# Altium PCB PCB1-LTC2949-V1.PcbDoc
Units mil, origin at the board's own origin, x right, y up, seen from the top; angles counter-clockwise.
Board outline 6000 x 4000 mil, 2 copper layers (Top Layer, Bottom Layer); 41 components, 41 nets, 144 pads, 10 vias.
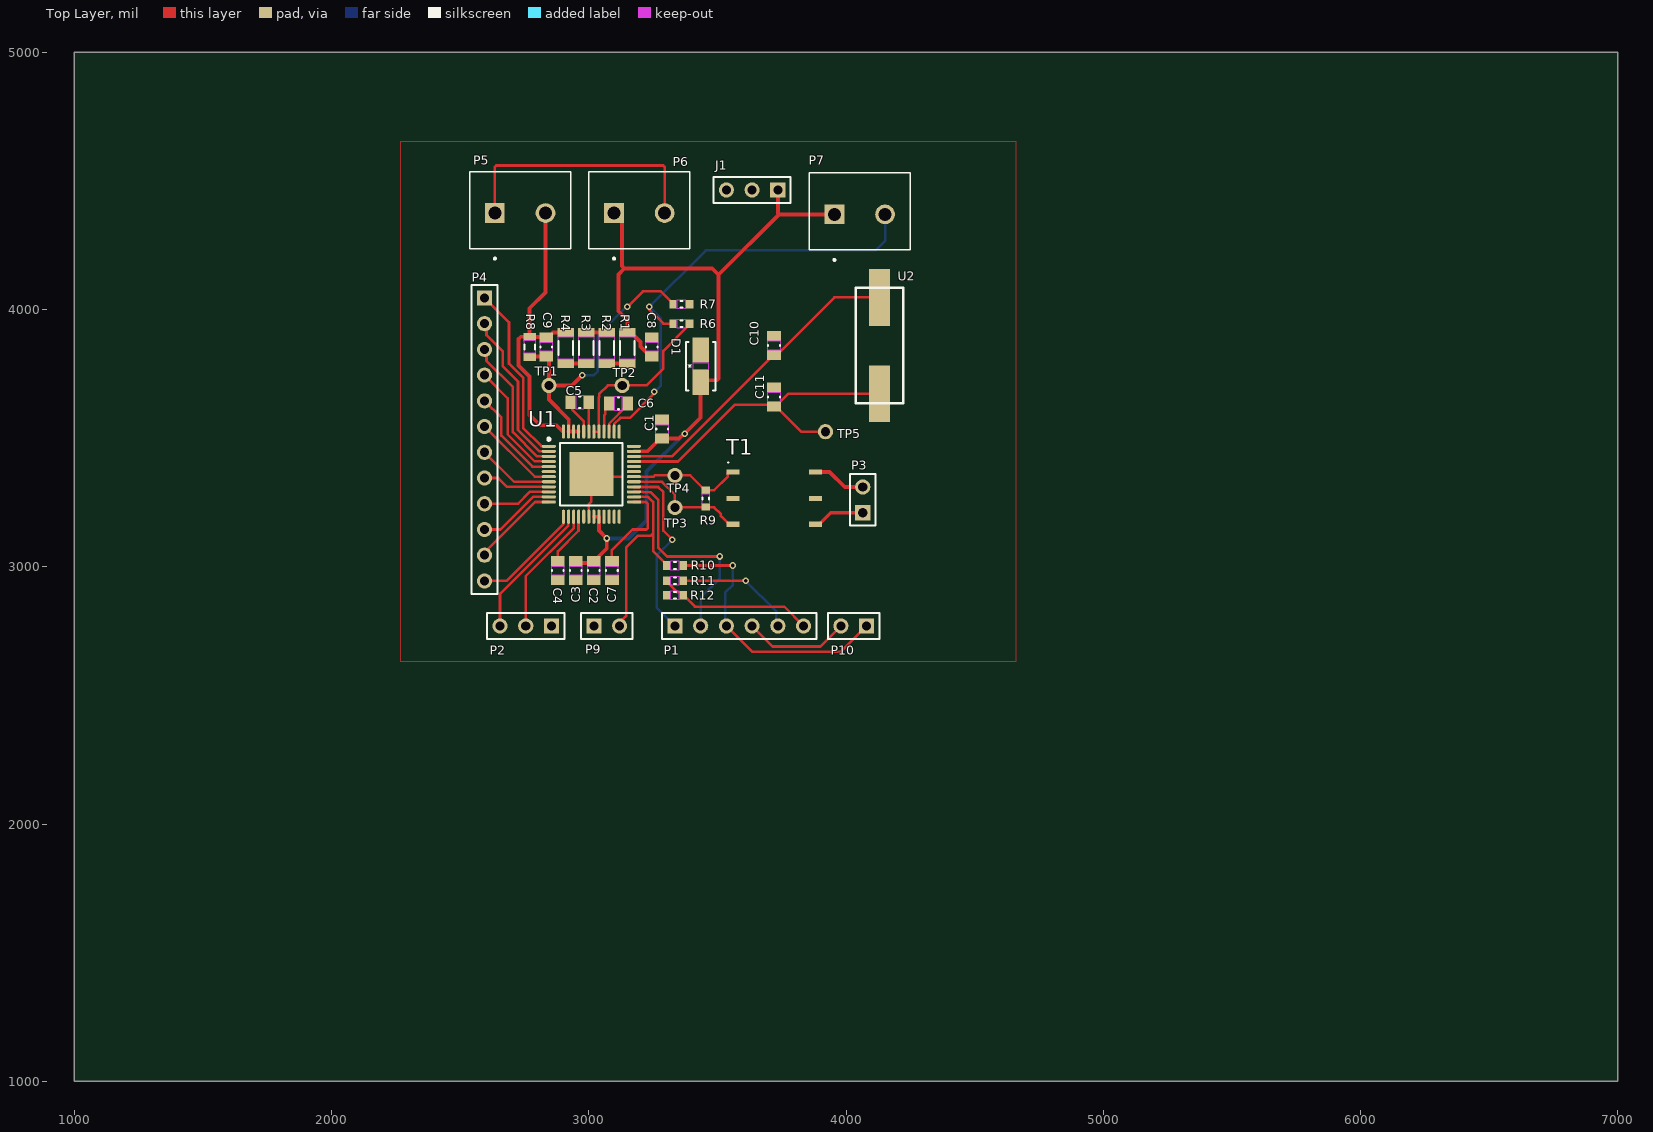
[diagram p0: Top Layer view]
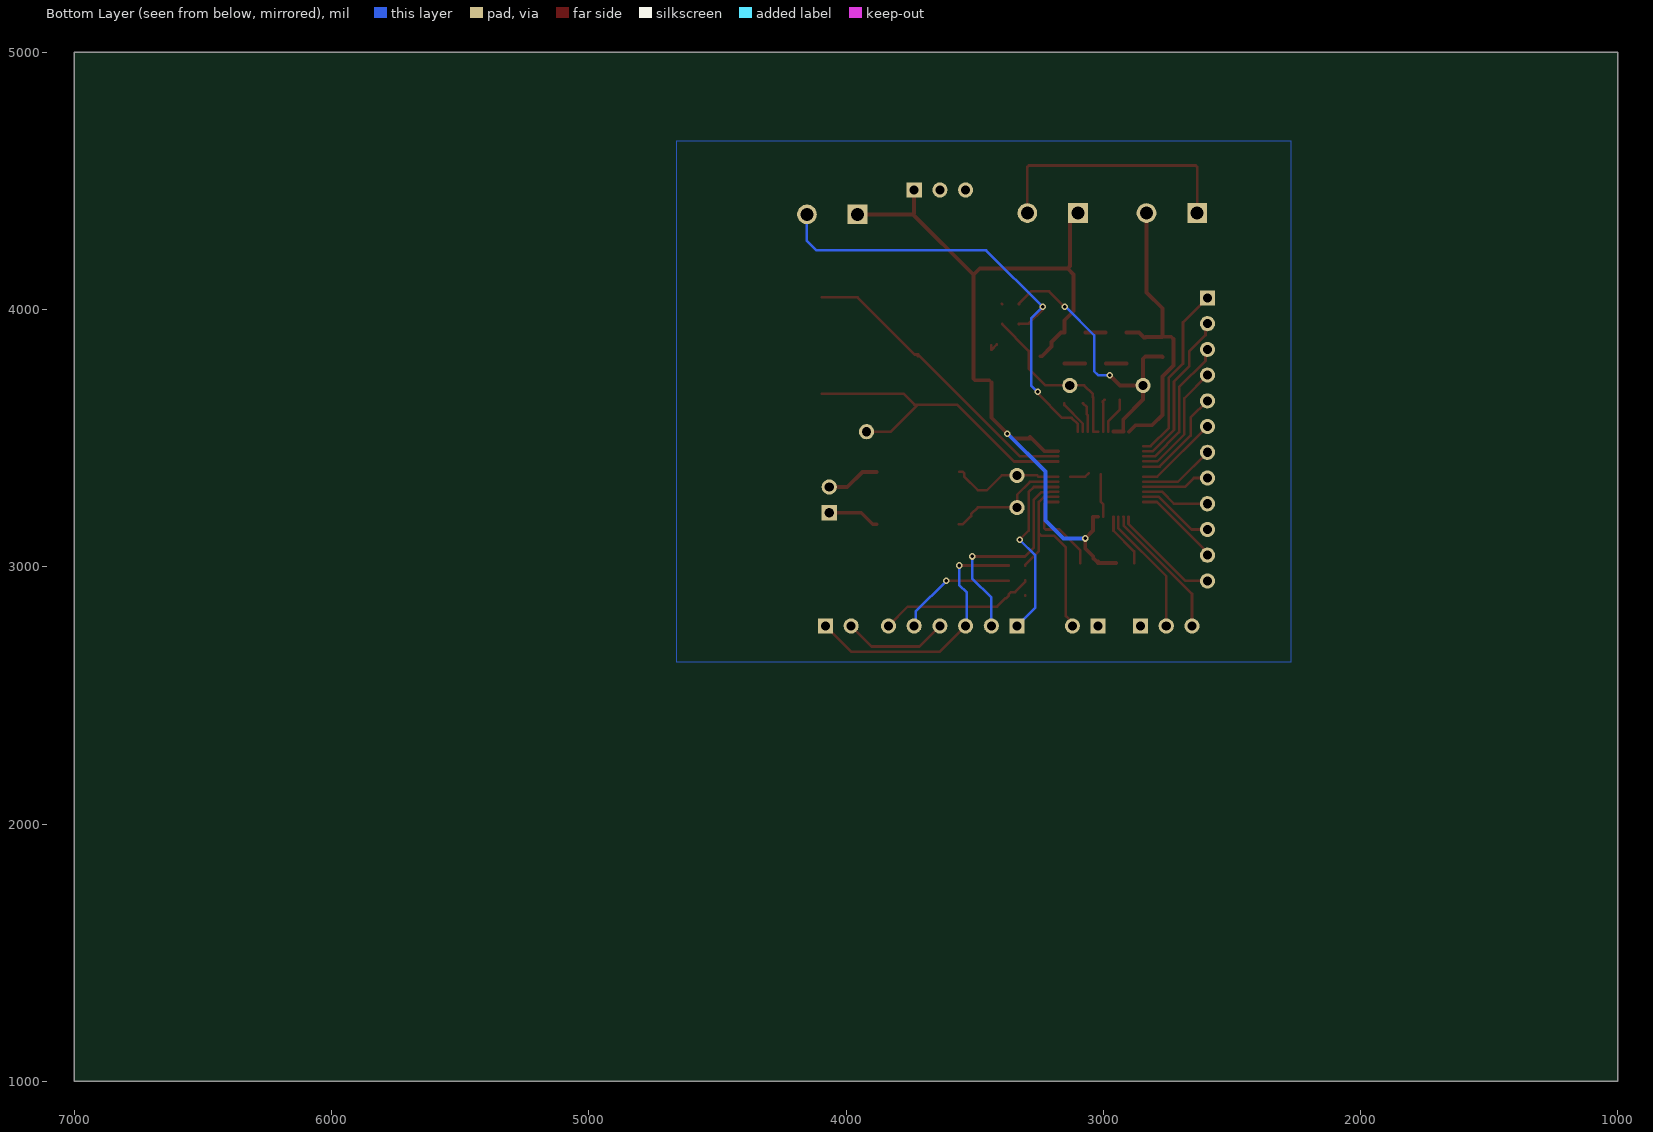
[diagram p1: Bottom Layer view, seen from below]
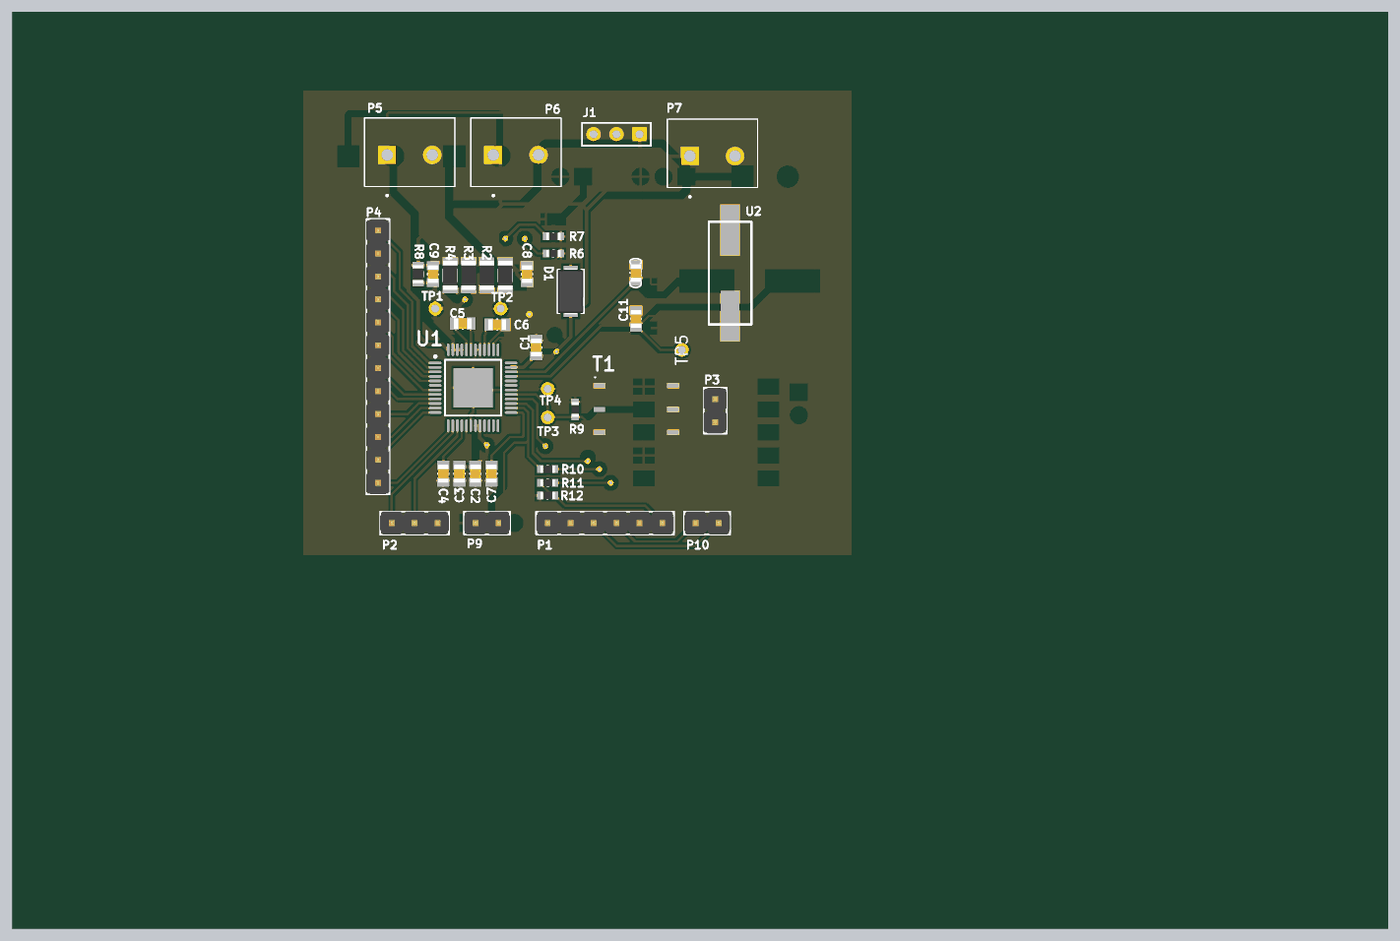
[diagram p2: 3D render of the assembled board from above, using the file's embedded part models]

## Layer stack, top to bottom
Top Solder: solder mask 0.4, Solder Resist, Dk 3.5
Top Layer: signal copper 1.4
Dielectric 1: dielectric 12.6, FR-4, Dk 4.8
Bottom Layer: signal copper 1.4
Bottom Solder: solder mask 0.4, Solder Resist, Dk 3.5

## Board outline
1000,1000 7000,1000 7000,5000 1000,5000

## Design rules (kind name [scope] priority, off if disabled: settings)
Clearance [All] p1: gap=10 ignorepadtopadclearanceinfootprint=FALSE except(0: Arc-Hole Track-Hole SMDPad-Hole THPad-Hole Via-Hole Fill-Hole Poly-Hole Region-Hole Text-Hole; 5: Arc-Arc Arc-Track Track-Track SMDPad-SMDPad; 7.87: Arc-SMDPad Track-SMDPad)
PolygonConnect [All] p1: connectstyle=Relief reliefconductorwidth=10 reliefentries=4 polygonreliefangle="90 Angle" airgapwidth=10
RoutingVias [All] p1: holewidth=28 width=50 viastyle="Through Hole" minholewidth=28 minwidth=50 maxholewidth=28 maxwidth=50
SolderMaskExpansion [All] p1: expansion=1.97 istentingtop=FALSE
Width [All] p1: maxlimit=20 minlimit=5 preferedwidth=10 minimp=50.000000 maximp=50.000000 favimp=50.000000
30 further rules are at their usual default settings.

## Classes and differential pairs
net class V[1..12]: V1 V2 V3 V4 V5 V6 V7 V8 V9 V10 V11 V12
component class "MAIN IC": C1 C2 C3 C4 C5 C6 C7 C8 C9 C10 C11 D1 J1 P1 R1 R2 R3 R4 R6 R7 R8 R9 R10 R11 R12 TP1 TP2 TP3 TP4 TP5 U1 U2
component class CONNECTORS: P2 P3 P4 P5 P7 P10

## Components (designator, comment, footprint, x,y, rotation, side; value= is the part's Value field where it differs from the comment)
C1 "Nonpolarized Capacitor" "0805 - Capacitor" 3285,3535 r90 top value=1uF
C2 "Nonpolarized Capacitor" "0805 - Capacitor" 3020,2985.16 r270 top value=1uF
C3 "Nonpolarized Capacitor" "0805 - Capacitor" 2950,2985.16 r270 top value=1uF
C4 "Nonpolarized Capacitor" "0805 - Capacitor" 2880,2985.16 r270 top value=1uF
C5 "Nonpolarized Capacitor" "0805 - Capacitor" 2965,3640 r0 top value=1uF
C6 "Nonpolarized Capacitor" "0805 - Capacitor" 3115,3635 r0 top value=1uF
C7 "Nonpolarized Capacitor" "0805 - Capacitor" 3090,2985.16 r270 top value=1uF
C8 "Nonpolarized Capacitor" "0805 - Capacitor" 3245,3855 r90 top value=100pF
C9 "Nonpolarized Capacitor" "0805 - Capacitor" 2835,3855 r90 top value=4.7nF
C10 "Nonpolarized Capacitor" "0805 - Capacitor" 3720,3860 r270 top value=28pF
C11 "Nonpolarized Capacitor" "0805 - Capacitor" 3720,3660 r270 top value=28pF
D1 "Zener" "SMA - DIODE" 3435,3780 r270 top
J1 "1x3 Header" HDR1X3 3735,4465 r180 top
P1 "1x6 Header" HDR1X6 3335,2770 r0 top
P2 "1x3 Header" HDR1X3 2855,2770 r180 top
P3 "1x2 Header" HDR1X2 4065,3210 r90 top
P4 "1x12 Header" HDR1X12 2595,4045 r270 top
P5 "CUI_TB002-500-02" CUI_TB002-500-02 2635,4375 r0 top
P6 "CUI_TB002-500-02" CUI_TB002-500-02 3098.15,4375 r0 top
P7 "CUI_TB002-500-02" CUI_TB002-500-02 3955,4370 r0 top
P9 "1x2 Header" HDR1X2 3020,2770 r0 top
P10 "1x2 Header" HDR1X2 4080,2770 r180 top
R1 "Resistor" "1206 - Resistor" 3150,3850 r90 top value=100k
R2 "Resistor" "1206 - Resistor" 3070,3850 r270 top value=100k
R3 "Resistor" "1206 - Resistor" 2990,3850 r90 top value=100k
R4 "Resistor" "1206 - Resistor" 2910,3850 r270 top value=100k
R6 "Resistor" "0603 - Resistor" 3360,3945 r180 top value=100m
R7 "Resistor" "0603 - Resistor" 3360,4020 r180 top value=1k
R8 "Resistor" "0805 - Resistor" 2770,3855 r90 top value=10k
R9 "Resistor" "0603 - Resistor" 3455,3265 r90 top value=120
R10 "Resistor" "0603 - Resistor" 3335,3005 r0 top value=5k
R11 "Resistor" "0603 - Resistor" 3335,2945 r0 top value=3k
R12 "Resistor" "0603 - Resistor" 3335,2890 r180 top value=1k
T1 "HM2101NLT" HM2101NLT 3720,3265 r270 top
TP1 "Test Point" "Test Point" 2845,3705 r90 top locked
TP2 "Test Point" "Test Point" 3130,3705 r90 top locked
TP3 "Test Point" "Test Point" 3335,3230 r90 top locked
TP4 "Test Point" "Test Point" 3335,3355 r90 top locked
TP5 "Test Point" "Test Point" 3920,3525 r90 top locked
U1 "LTC2949" LTC2949 3010,3360 r0 top
U2 "ABLS-4.000MHZ-K4T" ABLS_4MHZ-K4T 4130,3860 r270 top

## Footprints (in the part's own frame and the unit in brackets; to place one, negate y for a bottom-side part, rotate by r counter-clockwise, add the part's x,y. Pads: shape width x height; smd on the part's side, far side on the other; paste and mask are expansions set on the pad)
"0603 - Resistor" [mm] "0603 Chip Resistor - IPC Medium Density"
  rect 0.7x0.85 smd: 1(-0.825,0) 2(0.825,0)
  Top Layer keep-out region: -0.45,0.4 -0.45,-0.4 0.45,-0.4 0.45,0.4
  silkscreen extent -0.1,-0.33 0.1,0.33, body extent -0.8,-0.4 0.8,0.4, height 0.45
"0805 - Capacitor" [mm] "0805 Chip Capacitor - IPC Medium Density"
  rect 1x1.35 smd: 1(-0.925,0) 2(0.925,0)
  Top Layer keep-out region: -0.4,0.65 -0.4,-0.65 0.4,-0.65 0.4,0.65
  silkscreen extent -0.05,-0.58 0.05,0.58, body extent -1,-0.6 1,0.6, height 1.2
"0805 - Resistor" [mm] "0805 Chip Resistor - IPC Medium Density"
  rect 0.75x1.25 smd: 1(-1,0) 2(1,0)
  Top Layer keep-out region: -0.6,0.6 -0.6,-0.6 0.6,-0.6 0.6,0.6
  silkscreen extent -0.25,-0.53 0.25,0.53, body extent -1,-0.6 1,0.6, height 0.5
"1206 - Resistor" [mm] "1206 Chip Resistor - IPC Medium Density"
  rect 0.9x1.65 smd: 1(-1.525,0) 2(1.525,0)
  Top Layer keep-out region: -1.05,0.8 -1.05,-0.8 1.05,-0.8 1.05,0.8
  silkscreen extent -0.7,-0.72 0.7,0.72, body extent -1.6,-0.8 1.6,0.8, height 0.55
ABLS_4MHZ-K4T [mm]
  rect 5.6x2.1 smd: 1(-4.75,0) 2(4.75,0)
  silkscreen extent -5.7,-2.35 5.7,2.35
CUI_TB002-500-02 [mm] "1x2 Screw Terminal Block"
  rect 1.95x1.95 hole 1.3: 1(0,0)
  round 1.95 hole 1.3: 2(5,0)
  silkscreen extent -2.5,-4.6 7.5,4.1, body extent -2.5,-3.95 8,3.65, height 10
HDR1X2 [mm] "Connector; Header; 2 Position"
  rect 1.5x1.5 hole 0.9: 1(0,0)
  round 1.5 hole 0.9: 2(2.54,0)
  silkscreen extent -1.27,-1.27 3.81,1.27, body extent -1.27,-1.27 3.81,1.27, height 8.54
HDR1X3 [mm] "Connector; Header; 3 Position"
  rect 1.5x1.5 hole 0.9: 1(0,0)
  round 1.5 hole 0.9: 2(2.54,0) 3(5.08,0)
  silkscreen extent -1.27,-1.27 6.35,1.27
HDR1X6 [mm] "Connector; Header; 6 Position"
  rect 1.5x1.5 hole 0.9: 1(0,0)
  round 1.5 hole 0.9: 2(2.54,0) 3(5.08,0) 4(7.62,0) 5(10.16,0) 6(12.7,0)
  silkscreen extent -1.27,-1.27 13.97,1.27, body extent -1.27,-1.27 13.97,1.27, height 8.54
HDR1X12 [mm] "Connector; Header; 12 Position"
  rect 1.5x1.5 hole 0.9: 1(0,0)
  round 1.5 hole 0.9: 2(2.54,0) 3(5.08,0) 4(7.62,0) 5(10.16,0) 6(12.7,0) 7(15.24,0) 8(17.78,0) 9(20.32,0) 10(22.86,0) 11(25.4,0) 12(27.94,0)
  silkscreen extent -1.27,-1.27 29.21,1.27, body extent -1.27,-1.27 29.21,1.27, height 8.54
HM2101NLT [mm]
  rect 0.51x1.27 smd: 1(-2.64,-4.05) 2(0,-4.05) 3(2.53,-4.045) 4(2.53,4.095) 5(0,4.095) 6(-2.64,4.095)
  silkscreen extent -3.55,-4.55 -3.55,-4.5, body extent -3.88,-4.35 3.78,4.45, height 0.25
LTC2949 [mm] "LQFP, 48-Leads, IPC Medium Density"
  oval 1.4x0.3 smd mask+0.05: 1(-4.2,2.75) 2(-4.2,2.25) 3(-4.2,1.75) 4(-4.2,1.25) 5(-4.2,0.75) 6(-4.2,0.25) 7(-4.2,-0.25) 8(-4.2,-0.75) 9(-4.2,-1.25) 10(-4.2,-1.75) 11(-4.2,-2.25) 12(-4.2,-2.75) 25(4.2,-2.75) 26(4.2,-2.25) 27(4.2,-1.75) 28(4.2,-1.25) 29(4.2,-0.75) 30(4.2,-0.25) 31(4.2,0.25) 32(4.2,0.75) 33(4.2,1.25) 34(4.2,1.75) 35(4.2,2.25) 36(4.2,2.75)
  oval 0.3x1.4 smd mask+0.05: 13(-2.75,-4.2) 14(-2.25,-4.2) 15(-1.75,-4.2) 16(-1.25,-4.2) 17(-0.75,-4.2) 18(-0.25,-4.2) 19(0.25,-4.2) 20(0.75,-4.2) 21(1.25,-4.2) 22(1.75,-4.2) 23(2.25,-4.2) 24(2.75,-4.2) 37(2.75,4.2) 38(2.25,4.2) 39(1.75,4.2) 40(1.25,4.2) 41(0.75,4.2) 42(0.25,4.2) 43(-0.25,4.2) 44(-0.75,4.2) 45(-1.25,4.2) 46(-1.75,4.2) 47(-2.25,4.2) 48(-2.75,4.2)
  rect 4.35x4.35 smd: 49(0,0)
  silkscreen extent -4.32,-3.1 3.1,3.57, body extent -3.5,-3.5 3.5,3.5, height 1.6
"SMA - DIODE" [mm] "Molded Diode, 2-Leads, Body 4.38x2.63mm, IPC Medium Density"
  rect 2.5x1.6 smd: 1(-1.6,0) 2(1.6,0)
  Top Layer keep-out region: -0.3,0.8 -0.3,-0.8 0.3,-0.8 0.3,0.8
  silkscreen extent -2.4,-1.45 2.4,1.45, body extent -2.6,-1.43 2.6,1.43, height 2.95
"Test Point" [mm] "Test Point"
  round 1.5 hole 0.9: 1(0,0)

## Part data
C1 C2 C3 C4 C5 C6 C7 C8 C9 C10 C11: library part "Capacitor - Nonpolarized"
D1: "Zener Diode"
J1 P2: "1x3 Pin Header"
P1: "1x6 Pin Header"
P3 P9 P10: "1x2 Pin Header"
P4: "1x12 Pin Header"
P5 P6 P7: "1x2 Screw Terminal Block", Manufacturer="CUI Devices", Manufacturer Part Number=TB002-500-02BE, Supplier Part Number=102-6145-ND, Supplier=Digikey
T1: "Pulse Transformer 1:1 Surface Mount 150µH, 450µH"
U1: Manufacturer="Analog Devices", Manufacturer Part Number=LTC2949ILXE#3ZZPBF, Supplier Part Number=584-2949ILXE3ZZPBF, Supplier=Mouser
U2: "Crystal Oscillator 4MHz 18pF"

## Via types
v1: diameter 25.59, hole 13.78, Top Layer to Bottom Layer, 10 vias

## Nets (pads, with @x,y where several pads share a name; then routed paths per layer and width w, separated by ;. In a path a pad name is that pad's centre, name@x,y a point inside that pad or via, vN(x,y) a via of type N, cw(c..) or ccw(c..) an arc to the next point about the centre after c; other vN are vias at no path point)
+12: C1.1 C2.1 C3.1 C8.1 D1.2 J1.1 P6.1 P7.1 R1.2 U1.19 U1.20 U1.35 | length 3524.5
  Top Layer w10: U1.19 U1.19@3020,3194.49 ; P6.1@3075,4351.85 P6.1 ; D1.2 D1.2@3442.99,3725
  Top Layer w15: C3.1@2950,3014.69 3020,3014.69 C2.1 3026.89,3021.57 3039.07,3033.76 3039.07,3040.65 3070,3071.57 v1(3070,3110) 3039.53,3140.47 U1.20 U1.19 ; P6.1 3129.04,4344.11 3129.04,4169.11 3138.15,4160 ; U1.35@3175.35,3448.9 3228.43,3448.9 C1.1@3285,3505.47 ; C8.1 3238.11,3818.58 3200.45,3856.24 3200.45,3874.35 3164.76,3910.04 R1.2 3150,3958.24 3115,3993.24 3115,4136.85 3138.15,4160 ; C1.1 3351.41,3498.58 3369.98,3517.15 v1(3372.85,3517.15) ; v1@3375,3519.31 3435,3579.31 D1.2 ; D1.2@3442.99,3725 3499.14,3725 3505,3730.86 3505,4135 ; J1.1 3735,4375 3740,4370 ; P7.1 3740,4370 ; 3138.15,4160 3480,4160 3505,4135 ; 3505,4135 3740,4370
  Bottom Layer w15: v1(3070,3110) 3155,3110 3225,3180 3225,3370 3372.15,3517.15 v1(3372.85,3517.15)
AGND: C1.2 C2.2 C3.2 C4.2 C7.2 C8.2 C9.1 C10.1 C11.1 D1.1 J1.3 P5.1 P6.2 P9.1 R7.1 R7.2 R8.1 R12.2 TP1.1 U1.17 U1.18 U1.45 U1.47 U1.49 | length 2502
  Top Layer w10: P5.1 2635,4554.14 2640.86,4560 3289.14,4560 3295,4554.14 P6.2 ; U1.18 3000.16,3243.16 3010,3253 U1.49 ; U1.49@3056.87,3363.16 3069.87,3350.16 3127.14,3350.16 ; v1(3150,4010) 3210.24,4070.24 3280.24,4070.24 3327.52,4022.95 R7.2 ; R12.2@3302.52,2887.05 R12.2 ; R7.1 R7.1@3395,4022.52 ; D1.1@3413.93,3864.06 D1.1 D1.1@3435,3860.71
  Top Layer w15: R8.1 2771.48,3817.11 2833.52,3817.11 C9.1 2845,3808.58 TP1.1 ; U1.47 U1.47@2922,3525.35 ; U1.45 U1.47@2922,3525.35 ; v1(2975,3745) 2935,3705 TP1.1 ; TP1.1 2845,3650.18 2922,3573.18 U1.47@2922,3525.35
  Bottom Layer w10: v1(2975,3745) 3020,3745 3035,3760 3035,3900 3145,4010 v1(3150,4010) v1@3150,4016.57
CLKI: C11.2 TP5.1 U1.33 U2.2 | length 1272.6
  Top Layer w10: U1.33 3346.91,3409.21 3568.17,3630.47 C11.2@3720,3630.47 ; TP5.1 3825.47,3525 C11.2@3720,3630.47 ; U2.2@4095,3672.99 3776.3,3672.99 3733.78,3630.47 C11.2@3720,3630.47
CLKO: C10.2 U1.34 U2.1 | length 1193.2
  Top Layer w10: U1.34 3323.9,3428.9 C10.2@3716.79,3821.79 ; C10.2@3710.83,3816.3 C10.2@3720,3825.47 ; C10.2@3720,3818.58 C10.2@3726.65,3825.24 ; C10.2@3720.24,3825.24 C10.2@3726.65,3825.24 ; U2.1@4095,4047.01 3955.31,4047.01 3733.54,3825.24 C10.2@3726.65,3825.24
IOVCC: P9.2 R10.1 U1.26 | length 794.8
  Top Layer w10: P9.2 3120,2782.97 3145,2807.97 3145,3075 3190,3120 3240,3120 3250,3130 ; U1.26 3231.01,3271.42 3250,3252.43 3250,3130 ; R10.1 3302.52,3007.95 3250,3060.47 3250,3130
NetC4_1: C4.1 U1.16 | length 213.4
  Top Layer w10: C4.1@2880,3014.69 2880,3060 2960,3140 2960,3193.86 U1.16
NetC5_1: C5.1 U1.44 | length 143.3
  Top Layer w10: C5.1@2935.47,3650 2935.47,3610.47 2980,3565.94 2980,3525.83 U1.44
NetC5_2: C5.2 U1.43 | length 125.3
  Top Layer w10: C5.2@2994.53,3650 C5.2@3001.63,3642.89 ; U1.43 3000.16,3593.78 3000,3593.94 3000,3638.58 C5.2
NetC6_1: C6.1 U1.40 | length 117.3
  Top Layer w10: U1.40@3060,3525.35 3060,3588.28 3063.9,3592.18 3063.9,3620.31 C6.1
NetC6_2: C6.2 U1.39 | length 139.8
  Top Layer w10: U1.39@3078.9,3525.26 U1.39 3079.24,3525.7 3079.24,3555.94 3151.42,3628.11 C6.2
NetC7_1: C7.1 U1.25 | length 377
  Top Layer w10: C7.1@3090,3014.69 3090,3065 3170,3145 3224.14,3145 3230,3150.86 3230,3244.14 3222.41,3251.73 U1.25
NetP1_1: P1.1 U1.28 | length 711.3
  Top Layer w10: U1.28@3175.35,3310 3270,3310 3290,3290 3290,3140 v1(3325,3105)
  Bottom Layer w10: v1(3325,3105) 3265,3045 3265,2840 P1.1
NetP1_2: P1.2 U1.27 | length 848.5
  Top Layer w10: U1.27 3210.61,3291.1 3211.72,3290 3240.71,3290 3270,3260.71 3270,3075 3305,3040 v1(3510,3040)
  Bottom Layer w10: P1.2 3435,2880 3510,2955 v1(3510,3040)
NetP1_3: P1.3 P10.1 R10.2 | length 1069.9
  Top Layer w10: R10.2 v1(3560,3005) ; P1.3 3635,2670 3980,2670 P10.1
  Bottom Layer w10: P1.3 3530,2775 3530,2900 3560,2930 v1(3560,3005)
NetP1_4: P1.4 P10.2 | length 411.3
  Top Layer w10: P1.4 3715,2690 3900,2690 P10.2
NetP1_5: P1.5 R11.2 | length 479.9
  Top Layer w10: R11.2 v1(3610,2945) ; P1.5@3727.5,2777.5 P1.5
  Bottom Layer w10: v1(3610,2945) 3729.65,2825.35 3729.65,2775.35 P1.5
NetP1_6: P1.6 R11.1 R12.1 | length 613.1
  Top Layer w10: R11.1@3302.52,2947.95 R11.1 3302.52,2942.05 3342.83,2901.73 3358.7,2901.73 3367.48,2892.95 R12.1 3367.48,2887.05 3376.26,2878.27 3379.21,2878.27 3412.48,2845 3760,2845 P1.6
NetP2_2: P2.2 U1.15 | length 501.7
  Top Layer w10: P2.2 2755,2963.28 2941.1,3149.39 U1.15
NetP2_3: P2.3 U1.14 | length 535
  Top Layer w10: P2.3 2655,2895 2921.07,3161.07 2921.07,3194.3 U1.14
NetP3_1: P3.1 T1.4 | length 202.3
  Top Layer w15: T1.4 3896.18,3165.39 3940.79,3210 P3.1
NetP3_2: P3.2 T1.6 | length 208.2
  Top Layer w15: T1.6 3936.06,3368.94 3995,3310 P3.2
NetP7_2: P7.2 R6.2 U1.38 | length 1859.3
  Top Layer w10: U1.38 3098.93,3525.7 3098.93,3554.23 3123.36,3578.66 3159.54,3578.66 3252.02,3671.13 3252.02,3677.02 v1(3255,3680) ; v1(3235,4010) 3235,4000 3290,3945 R6.2 R6.2@3327.52,3942.05
  Bottom Layer w10: v1(3255,3680) 3280,3705 3280,3965 3237.5,4007.5 3232.5,4007.5 3455,4230 4115,4230 4151.85,4266.85 P7.2
NetP8_2: R6.1 TP2.1 U1.41 U1.42 | length 673.9
  Top Layer w10: U1.42 U1.41 3039.53,3659.53 3040,3660 3040,3670.88 3074.12,3705 TP2.1 3225,3705 3290,3770 3290,3839.57 3392.48,3942.05 R6.1
NetR1_1: R1.1 R2.2 | length 80
  Top Layer w15: R2.2 R1.1
NetR2_1: R2.1 R3.2 | length 80
  Top Layer w15: R3.2 R2.1
NetR3_1: R3.1 R4.2 | length 80
  Top Layer w15: R4.2 R3.1
NetR9_1: R9.1 T1.3 TP3.1 U1.29 | length 487.9
  Top Layer w10: U1.29@3175.35,3330 3285,3330 3335,3280 TP3.1 3336.26,3231.26 3486.73,3231.26 3513.74,3204.25 3513.74,3197.44 3545.79,3165.39 T1.3
NetR9_2: R9.2 T1.1 TP4.1 U1.30 | length 448
  Top Layer w10: U1.30 3252.5,3350.16 3257.34,3355 TP4.1 3394.53,3355 3452.05,3297.48 R9.2 3486.73,3297.48 3540.55,3351.3 3540.55,3363.9 3545.59,3368.94 T1.1
V1: P4.1 U1.1 | length 696.5
  Top Layer w10: P4.1 2690,3950 2690,3790 2745,3735 2745,3540 2816.39,3468.61 2844.3,3468.61 U1.1
V2: P4.2 U1.2 | length 621.3
  Top Layer w10: P4.2 2602.5,3937.5 2602.5,3900.47 2665,3837.97 2665,3780 2725,3720 2725,3531.57 2807.64,3448.93 2844.3,3448.93 U1.2
V3: P4.3 U1.3 | length 546
  Top Layer w10: P4.3 2602.5,3837.5 2602.5,3800.47 2705,3697.97 2705,3523.28 2799.39,3428.9 U1.3
V4: P4.4 U1.4 | length 470.4
  Top Layer w10: P4.4 2685,3655 2685,3515 2790,3410 U1.4@2844.65,3410
V5: P4.5 U1.5 | length 396.5
  Top Layer w10: P4.5 2660,3580 2660,3510 2780.47,3389.53 U1.5
V6: P4.6 U1.7 | length 330.4
  Top Layer w10: P4.6 2595.16,3545 2790,3350.16 U1.7
V7: P4.7 U1.8 | length 297.1
  Top Layer w10: P4.7 2709.53,3330.47 U1.8
V8: P4.8 U1.9 | length 263.8
  Top Layer w10: P4.8 2647.74,3345 2681.95,3310.79 U1.9
V9: P4.9 U1.10 | length 269
  Top Layer w10: P4.9 2725,3245 2771.73,3291.73 U1.10@2844.65,3291.73
V10: P4.10 U1.11 | length 302.1
  Top Layer w10: P4.10 2656.72,3145 2783.45,3271.73 U1.11@2844.65,3271.73
V11: P4.11 U1.12 | length 341.1
  Top Layer w10: P4.11 2595,3055 2791.73,3251.73 U1.12
V12: P4.12 U1.13 | length 426.6
  Top Layer w10: P4.12 2680.15,2945 2901.73,3166.58 U1.13
VBATP: C9.2 P5.2 R4.1 R8.2 U1.48 | length 1172.4
  Top Layer w15: P5.2 2831.85,4066.85 2770,4005 R8.2 ; U1.48@2900,3525 2875,3550 2810,3550 2770,3590 2770,3739.75 2726.84,3782.91 2726.84,3885.58 2735.63,3894.37 R8.2 ; R4.1 2860.51,3910.04 2841.89,3891.42 C9.2 2833.52,3892.89 2771.48,3892.89 R8.2
pads on no net: J1.2 P2.1 T1.2 T1.5 U1.6 U1.21 U1.22 U1.23 U1.24 U1.31 U1.32 U1.36 U1.37 U1.46

## Polygon pours and split planes (outlines as drawn)
AGND on Bottom Layer "NONET_L02_P004" (solid, shelved, pour order 4): 2270,4655 4660,4655 4660,2630 2270,2630
AGND on Top Layer "NONET_L01_P003" (solid, shelved, pour order 3): 2270,4655 4660,4655 4660,2630 2270,2630